# EAGLE board OSPID2 (EAGLE 6.4)

Size 101.6 x 81.28 mm. Coordinates in mm from the lower left corner, seen from the top.
Outline: 0,0 101.6,0 101.6,81.28 0,81.28 0,0
Copper layers (1*16): Top 0.035mm / dielectric 1.5mm / Bottom 0.035mm
Design rules "default *": minimum track width 10mil, minimum drill 24mil, track to track 16mil, track to pad 8mil, pad to pad 16mil, via to via 8mil, smd to smd 8mil, copper to edge 25mil, drill to drill 16mil, minimum pad ring 10mil, minimum via ring 8mil, stop-mask expansion 4mil, vias tented up to drill 0mil, thermal gap 16mil
Net classes: 1 power: width 1.016 mm, clearance 0.305 mm

## Footprints (pad centres in the part's own frame; a part is rotated, then mirrored left to right if it is on the bottom)
AK500/3 = drill 1.321 long: 1 -5.004,0; 2 0,0; 3 5.004,0
DIODEBRIDGE = drill 0.8: + -2.54,2.54; - 2.54,-2.54; AC1 2.54,2.54; AC2 -2.54,-2.54
CPOL-RADIAL-10UF-25V = drill 0.7 pad 1.651 square: 1 1.27,0 | drill 0.7 pad 1.651: 2 -1.27,0
CAP-PTH-SMALL = drill 0.7 pad 1.651: 1 0,0; 2 2.54,0
DIODE-1N4001 = drill 1 pad 1.981: A -5.08,0; C 5.08,0
6PINHEADER = drill 1 octagon: P$1 -6.35,0; P$2 -3.81,0; P$3 -1.27,0; P$4 1.27,0; P$5 3.81,0; P$6 6.35,0
3,6-PAD = drill 3.6 pad 5.842: B3,6 0,0
TO-220-ALT = drill 1.016 long: GND 0,-3.81; IN -2.54,-3.81; OUT 2.54,-3.81 | hole 3.302: 0,11.176
POWER_JACK_PTH_LOCK = drill 2.997 pad 4.115: GND 0.025,6.557; GNDBREAK 3.762,10.7 | drill 3.2 pad 4.115: PWR 0,13.878
2X3_POGO = drill 1.2 pad 1.829 octagon: P$1 0,0; P$2 0,2.54; P$3 2.54,0; P$4 2.54,2.54; P$5 5.08,0; P$6 5.08,2.54
1X03_LOCK = drill 1.016 pad 1.88: 1 0,0.127; 2 2.54,-0.127; 3 5.08,0.127
1X05_LOCK = drill 1.016 pad 1.88: 1 0,0.127; 2 2.54,-0.127; 3 5.08,0.127; 4 7.62,-0.127; 5 10.16,0.127
LED5MM = drill 0.813 pad 1.676 octagon: A -1.27,0; K 1.27,0
LED5MM' = drill 0.813 pad 1.88: A -1.27,0; K 1.27,0
AK500/2 = drill 1.321 long: 1 -2.515,0; 2 2.515,0
AK500/4 = drill 1.321 long: 1 -7.518,0; 2 -2.489,0; 3 2.489,0; 4 7.518,0
1/6W-RES = drill 0.762: 1 -2.5,0; 2 2.5,0
AXIAL-0.3 = drill 0.9 pad 1.88: P$1 -3.81,0; P$2 3.81,0
SQM_5-10 = drill 1.016 square: P1 -2.54,0; P2 2.54,0
AXIAL-0.4 = drill 0.9 pad 1.88: P$1 -5.08,0; P$2 5.08,0
TACTILE-PTH = drill 1.016 pad 1.88: 1 -3.251,2.261; 2 3.251,2.261; 3 -3.251,-2.261; 4 3.251,-2.261
DIL28-3 = drill 0.813 long: 1 -16.51,-3.81; 2 -13.97,-3.81; 3 -11.43,-3.81; 4 -8.89,-3.81; 5 -6.35,-3.81; 6 -3.81,-3.81; 7 -1.27,-3.81; 8 1.27,-3.81; 9 3.81,-3.81; 10 6.35,-3.81; 11 8.89,-3.81; 12 11.43,-3.81; 13 13.97,-3.81; 14 16.51,-3.81; 15 16.51,3.81; 16 13.97,3.81; 17 11.43,3.81; 18 8.89,3.81; 19 6.35,3.81; 20 3.81,3.81; 21 1.27,3.81; 22 -1.27,3.81; 23 -3.81,3.81; 24 -6.35,3.81; 25 -8.89,3.81; 26 -11.43,3.81; 27 -13.97,3.81; 28 -16.51,3.81
DIL06 = drill 0.813 offset: 1 -2.54,-3.81; 2 0,-3.81; 3 2.54,-3.81; 4 2.54,3.81; 5 0,3.81; 6 -2.54,3.81
TRIAC = drill 1.1: 1 -2.54,0; 2 0,0; 3 2.54,0
DO35-10 = drill 0.813 long: A 5.08,0; C -5.08,0
DIL04 = drill 0.813 offset: 1 -1.27,-3.81; 2 1.27,-3.81; 3 1.27,3.81; 4 -1.27,3.81
HC49U-V = drill 0.813: 1 -2.413,0; 2 2.413,0

## Placement (x,y rotation side)
AUTO-MAN  [AK500/3]  55.56,2.86 0 top
BR41  2W01G  [DIODEBRIDGE]  85.72,61.59 180 top
C1  47uF  [CPOL-RADIAL-10UF-25V]  17.14,55.88 180 top
C2  47uF  [CPOL-RADIAL-10UF-25V]  24.13,55.88 0 top
C3  0.1uF  [CAP-PTH-SMALL]  39.05,23.5 180 top
C4  0.1uF  [CAP-PTH-SMALL]  31.43,9.53 0 top
C5  0.1uF  [CAP-PTH-SMALL]  28.89,57.15 270 top
C6  22pF  [CAP-PTH-SMALL]  34.92,31.11 180 top
C7  22pF  [CAP-PTH-SMALL]  27.94,31.11 180 top
C8  0.22uF  [CAP-PTH-SMALL]  65.41,77.47 0 top
C9  47uF  [CPOL-RADIAL-10UF-25V]  86.36,23.5 180 top
C10  47uF  [CPOL-RADIAL-10UF-25V]  86.36,29.21 180 top
D1  [DIODE-1N4001]  20.64,50.8 0 top
D2  [DIODE-1N4001]  58.1,16.51 270 top
FTDI  FTDI  [6PINHEADER]  7.62,26.04 90 top
H1  MOUNT-PAD-ROUND3.6  [3,6-PAD]  5.08,50.8 0 top
H2  MOUNT-PAD-ROUND3.6  [3,6-PAD]  88.9,50.8 0 top
H3  MOUNT-PAD-ROUND3.6  [3,6-PAD]  5.08,12.7 0 top
H4  MOUNT-PAD-ROUND3.6  [3,6-PAD]  88.9,12.7 0 top
H5  MOUNT-PAD-ROUND3.6  [3,6-PAD]  5.08,76.2 0 top
H6  MOUNT-PAD-ROUND3.6  [3,6-PAD]  96.52,76.2 0 top
H7  MOUNT-PAD-ROUND3.6  [3,6-PAD]  96.52,5.08 0 top
H8  MOUNT-PAD-ROUND3.6  [3,6-PAD]  5.08,5.08 0 top
IC1  [TO-220-ALT]  20.32,65.09 0 top
J1  POWER_JACKPTH_LOCK  [POWER_JACK_PTH_LOCK]  -3.17,65.72 270 top
JP1  [2X3_POGO]  26.35,5.4 180 top
JP3  [1X03_LOCK]  42.55,40.01 0 top
JP4  [1X03_LOCK]  63.18,19.37 0 top
JP5  [1X05_LOCK]  17.78,26.67 90 top
LED1  [LED5MM]  87.63,3.81 0 top
LED2  [LED5MM']  89.22,77.47 90 top
M3-IN  [AK500/2]  98.74,26.67 90 top
MAINS1  [AK500/4]  98.74,61.59 90 top
R1  330  [1/6W-RES]  80.64,5.08 270 top
R2  10K  [AXIAL-0.3]  54.93,16.51 90 top
R3  1M  [AXIAL-0.3]  30.16,23.18 0 top
R4  39  [1/6W-RES]  71.44,79.38 180 top
R5  390  [1/6W-RES]  61.59,79.38 0 top
R6  100  [1/6W-RES]  41.91,78.11 180 top
R7  470  [SQM_5-10]  64.45,65.09 90 top
R8  47K  [SQM_5-10]  75.25,65.09 90 top
R9  15k  [1/6W-RES]  41.27,60.01 180 top
R10  22k  [1/6W-RES]  82.87,26.35 90 top
R11  22k  [1/6W-RES]  86.68,18.1 180 top
R12  2.2k  [1/6W-RES]  65.72,25.4 0 top
R13  4.7k  [AXIAL-0.4]  75.56,12.7 180 top
S1  [TACTILE-PTH]  40.96,4.13 0 top
SENSOR  [AK500/3]  70.8,2.86 0 top
SPINDLE  [AK500/2]  98.74,15.24 90 top
U1  ATMEGA328P_PDIP  [DIL28-3]  35.24,16.51 180 top
U2  MOC3022M  [DIL06]  51.44,75.56 270 top
U3  BT139  [TRIAC]  80.01,76.83 180 top
U4  DB3  [DO35-10]  66.67,74.61 180 top
U5  PC817  [DIL04]  51.44,61.28 90 top
Y1  16MHz  [HC49U-V]  30.16,27.3 0 top

## Library data of the parts
AUTO-MAN M3-IN MAINS1 SENSOR SPINDLE = con-ptr500; OC_FARNELL: unknown; OC_NEWARK: unknown
BR41 FTDI U3 = connectors
C1 C2 C8-C10 R1 R4-R6 R9-R13 = SparkFun
C3-C7 = SparkFun-Capacitors
D1 D2 = SparkFun-DiscreteSemi
H1-H8 = holes
IC1 = SparkFun-PowerIC
J1 JP3-JP5 = SparkFun-Connectors
JP1 = SparkFun-Connectors; PROD_ID: HW-11044
LED1 = adafruit2012
LED2 = SparkFun-LED
R2 R3 R7 R8 = SparkFun-Resistors
S1 = SparkFun-Electromechanical
U1 = SparkFun-DigitalIC
U2 = optocoupler; MF: FAIRCHILD SEMICONDUCTOR; MPN: MOC3022-M; OC_FARNELL: 1021086; OC_NEWARK: 58K1956
U4 = diode
U5 = optocoupler; MPN: PC817X4J000F; OC_FARNELL: 9707727; OC_NEWARK: 97K7059
Y1 = SparkFun-FreqCtrl

## Nets
BUTTONS: JP3.2
CS1: JP5.4 U1.6
D8: U1.14
D9: U1.15
D10: U1.16
GND: C1.2 C2.2 C3.2 C4.1 C5.2 C6.1 C7.2 C9.2 C10.2 FTDI.P$1 FTDI.P$2 H1.B3,6 H2.B3,6 H3.B3,6 H4.B3,6 H5.B3,6 H6.B3,6 H7.B3,6 H8.B3,6 IC1.GND J1.GND J1.GNDBREAK JP1.P$6 JP3.3 JP4.3 JP5.5 LED1.K M3-IN.2 S1.3 S1.4 SENSOR.2 SPINDLE.2 U1.8 U1.22 U2.2 U5.3
MACH3: AUTO-MAN.1 C10.1 R10.2
MACH3_PWM: M3-IN.1 R11.1
MAINS_LIVE: BR41.AC1 C8.1 MAINS1.1 R5.2 U3.2
MANUAL: AUTO-MAN.3 JP4.2
MISO: JP1.P$1 U1.18
MOSI: JP1.P$4 JP5.2 U1.17
MOTOR_LIVE: MAINS1.4 R4.1 U3.3
N$1: U3.1 U4.C
N$2: C9.1 R10.1 R11.2
N$3: U2.4 U4.A
N$4: LED1.A R1.2
N$5: C8.2 R4.2
N$6: R7.P1 R8.P2 U5.1
N$7: BR41.- LED2.K U5.2
N$8: LED2.A R8.P1
N$10: JP4.1 R12.1
N$12: R13.P$1 SPINDLE.1
N$13: R6.1 U2.1
N$15: R5.1 U2.6
N$20: C7.1 R3.P$1 U1.10 Y1.1
N$22: C6.2 R3.P$2 U1.9 Y1.2
N$25: C1.1 D1.C IC1.IN
N$26: D1.A J1.PWR
N$28: C4.2 U1.21
N$29: BR41.+ R7.P2
NEUTRAL: BR41.AC2 MAINS1.2 MAINS1.3
RESET: D2.A FTDI.P$6 JP1.P$5 R2.P$2 S1.1 S1.2 U1.1
RX: FTDI.P$4 U1.2
SCK: JP1.P$3 JP5.3 U1.19
SENSOR: SENSOR.1 U1.24
SPEED: AUTO-MAN.2 U1.23
SPINDLE-ON: R13.P$2 U1.27
TRIAC: R6.2 U1.26
TX: FTDI.P$5 U1.3
VCC: C2.1 C3.1 C5.1 D2.C FTDI.P$3 IC1.OUT JP1.P$2 JP3.1 JP5.1 R1.1 R2.P$1 R9.2 R12.2 SENSOR.3 U1.7 U1.20
ZEROCROSS: R9.1 U1.4 U5.4

## Tracks (layer width: path | path; a pad name or v marks a point on that pad's centre or on a via)
CS1  (1 unrouted)
GND  (35 unrouted)
MACH3  (2 unrouted)
MACH3_PWM  (1 unrouted)
MAINS_LIVE  (4 unrouted)
MANUAL  (1 unrouted)
MISO  (1 unrouted)
MOSI  (2 unrouted)
MOTOR_LIVE  (2 unrouted)
N$1  (1 unrouted)
N$2  (2 unrouted)
N$3  (1 unrouted)
N$4  (1 unrouted)
N$5  (1 unrouted)
N$6  (2 unrouted)
N$7  (2 unrouted)
N$8  (1 unrouted)
N$10  (1 unrouted)
N$12  (1 unrouted)
N$13  (1 unrouted)
N$15  (1 unrouted)
N$20  (3 unrouted)
N$22  (3 unrouted)
N$25  (2 unrouted)
N$26  (1 unrouted)
N$28  (1 unrouted)
N$29  (1 unrouted)
NEUTRAL  (2 unrouted)
RESET  (6 unrouted)
RX  (1 unrouted)
SCK  (2 unrouted)
SENSOR  (1 unrouted)
SPEED  (1 unrouted)
SPINDLE-ON  (1 unrouted)
TRIAC  (1 unrouted)
TX  (1 unrouted)
VCC  (15 unrouted)
ZEROCROSS  (2 unrouted)

## Text on the board
tPlace: N L / Motor | L N / 120v | BEWARE!!!! / MAINS VOLTAGE!!!